# Altium PCB PCB1.PcbDoc
Units mm, origin at the board's own origin, x right, y up, seen from the top; angles counter-clockwise.
Board outline 95 x 94 mm, 2 copper layers (Top Layer, Bottom Layer); 18 components, 17 nets, 75 pads, 0 vias.
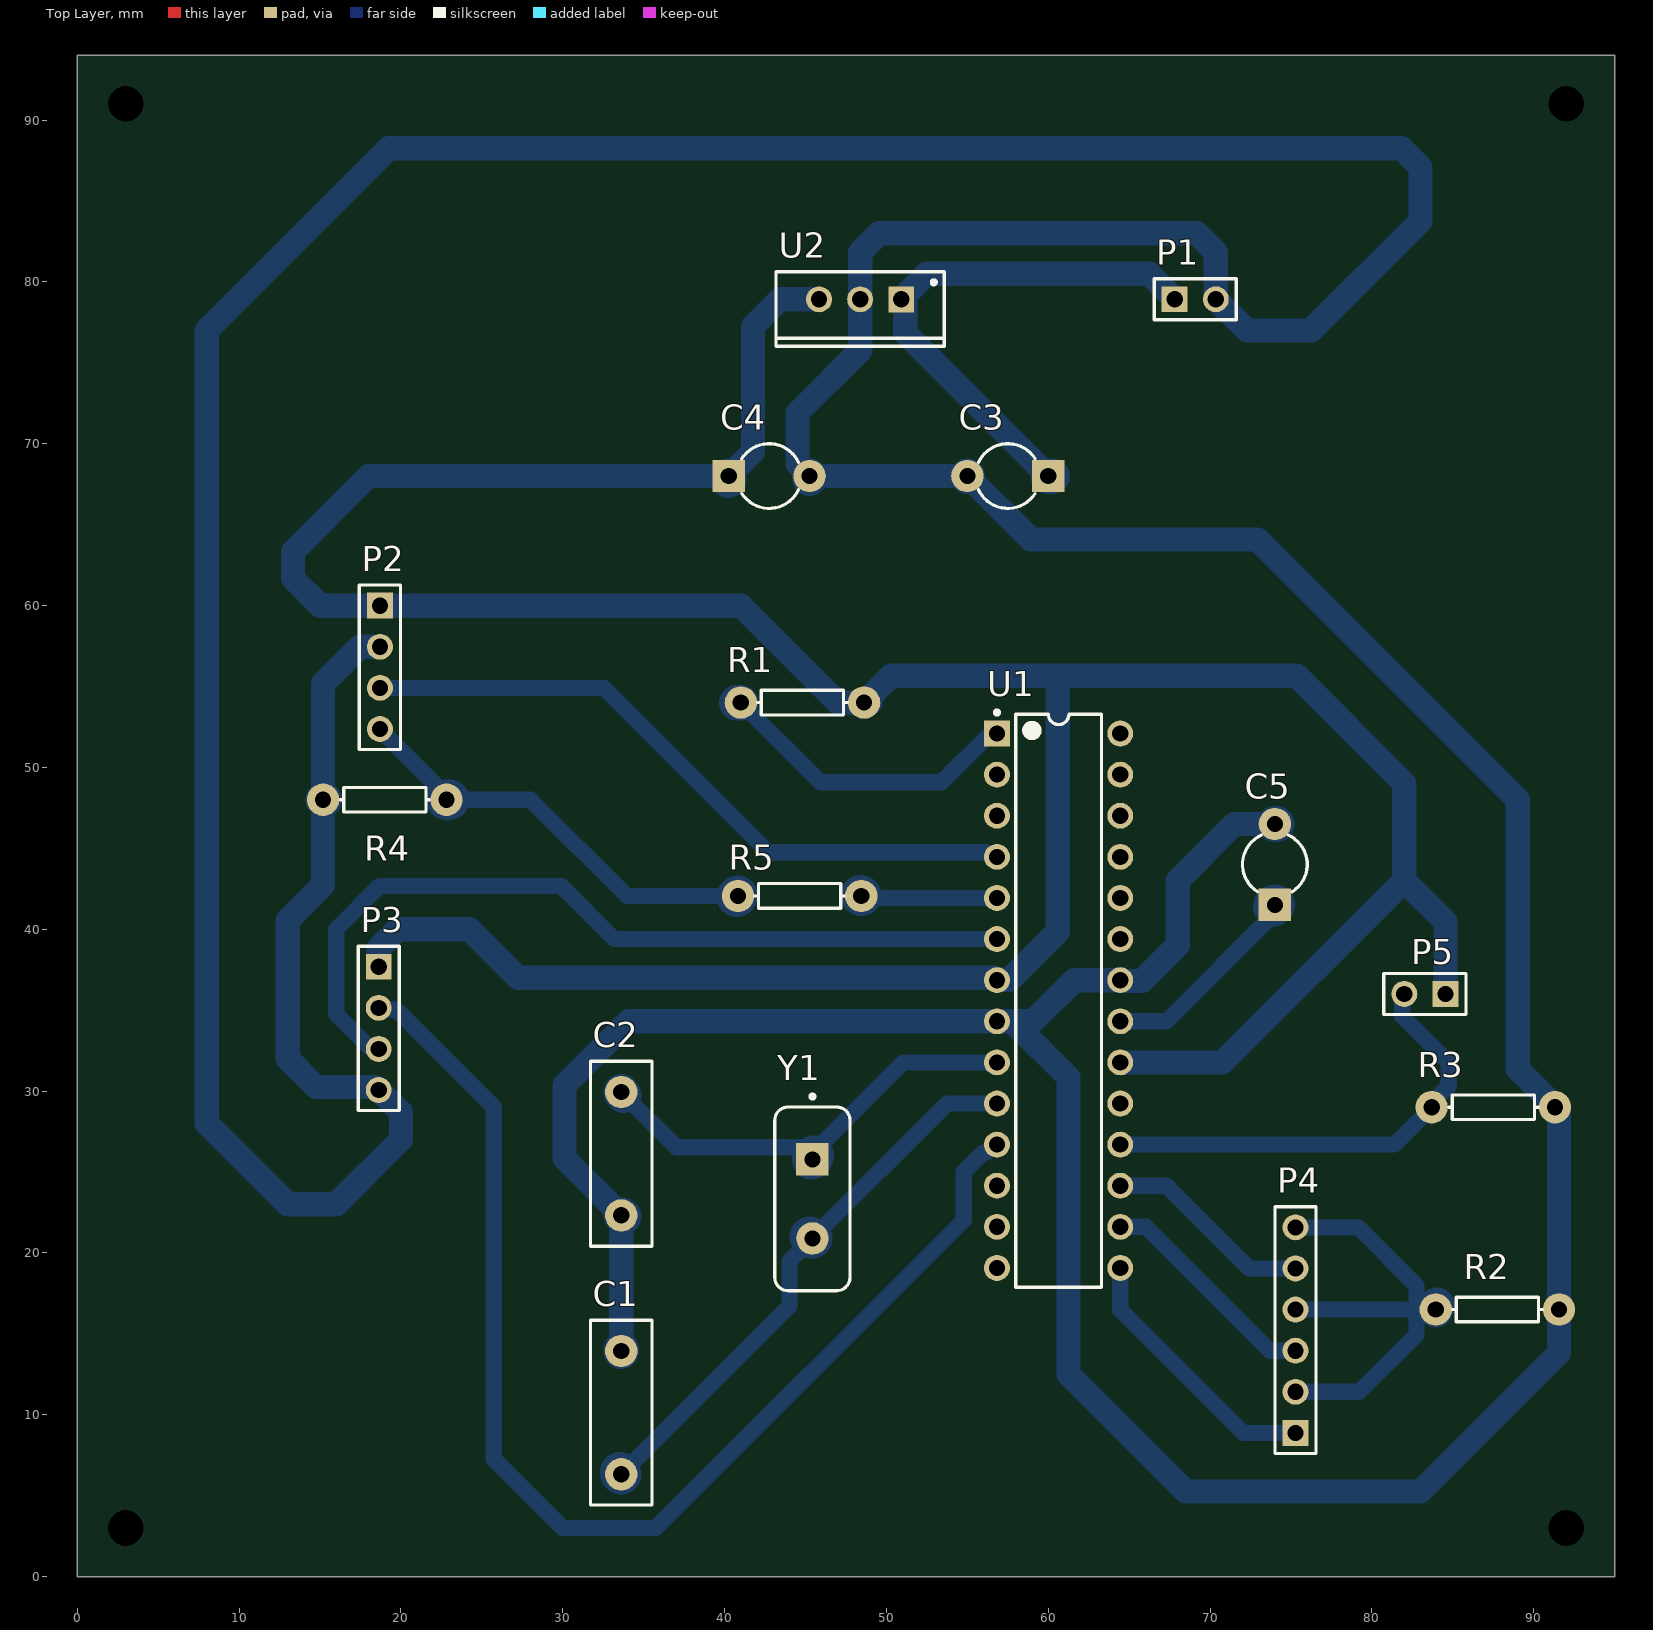
[diagram p0: Top Layer view]
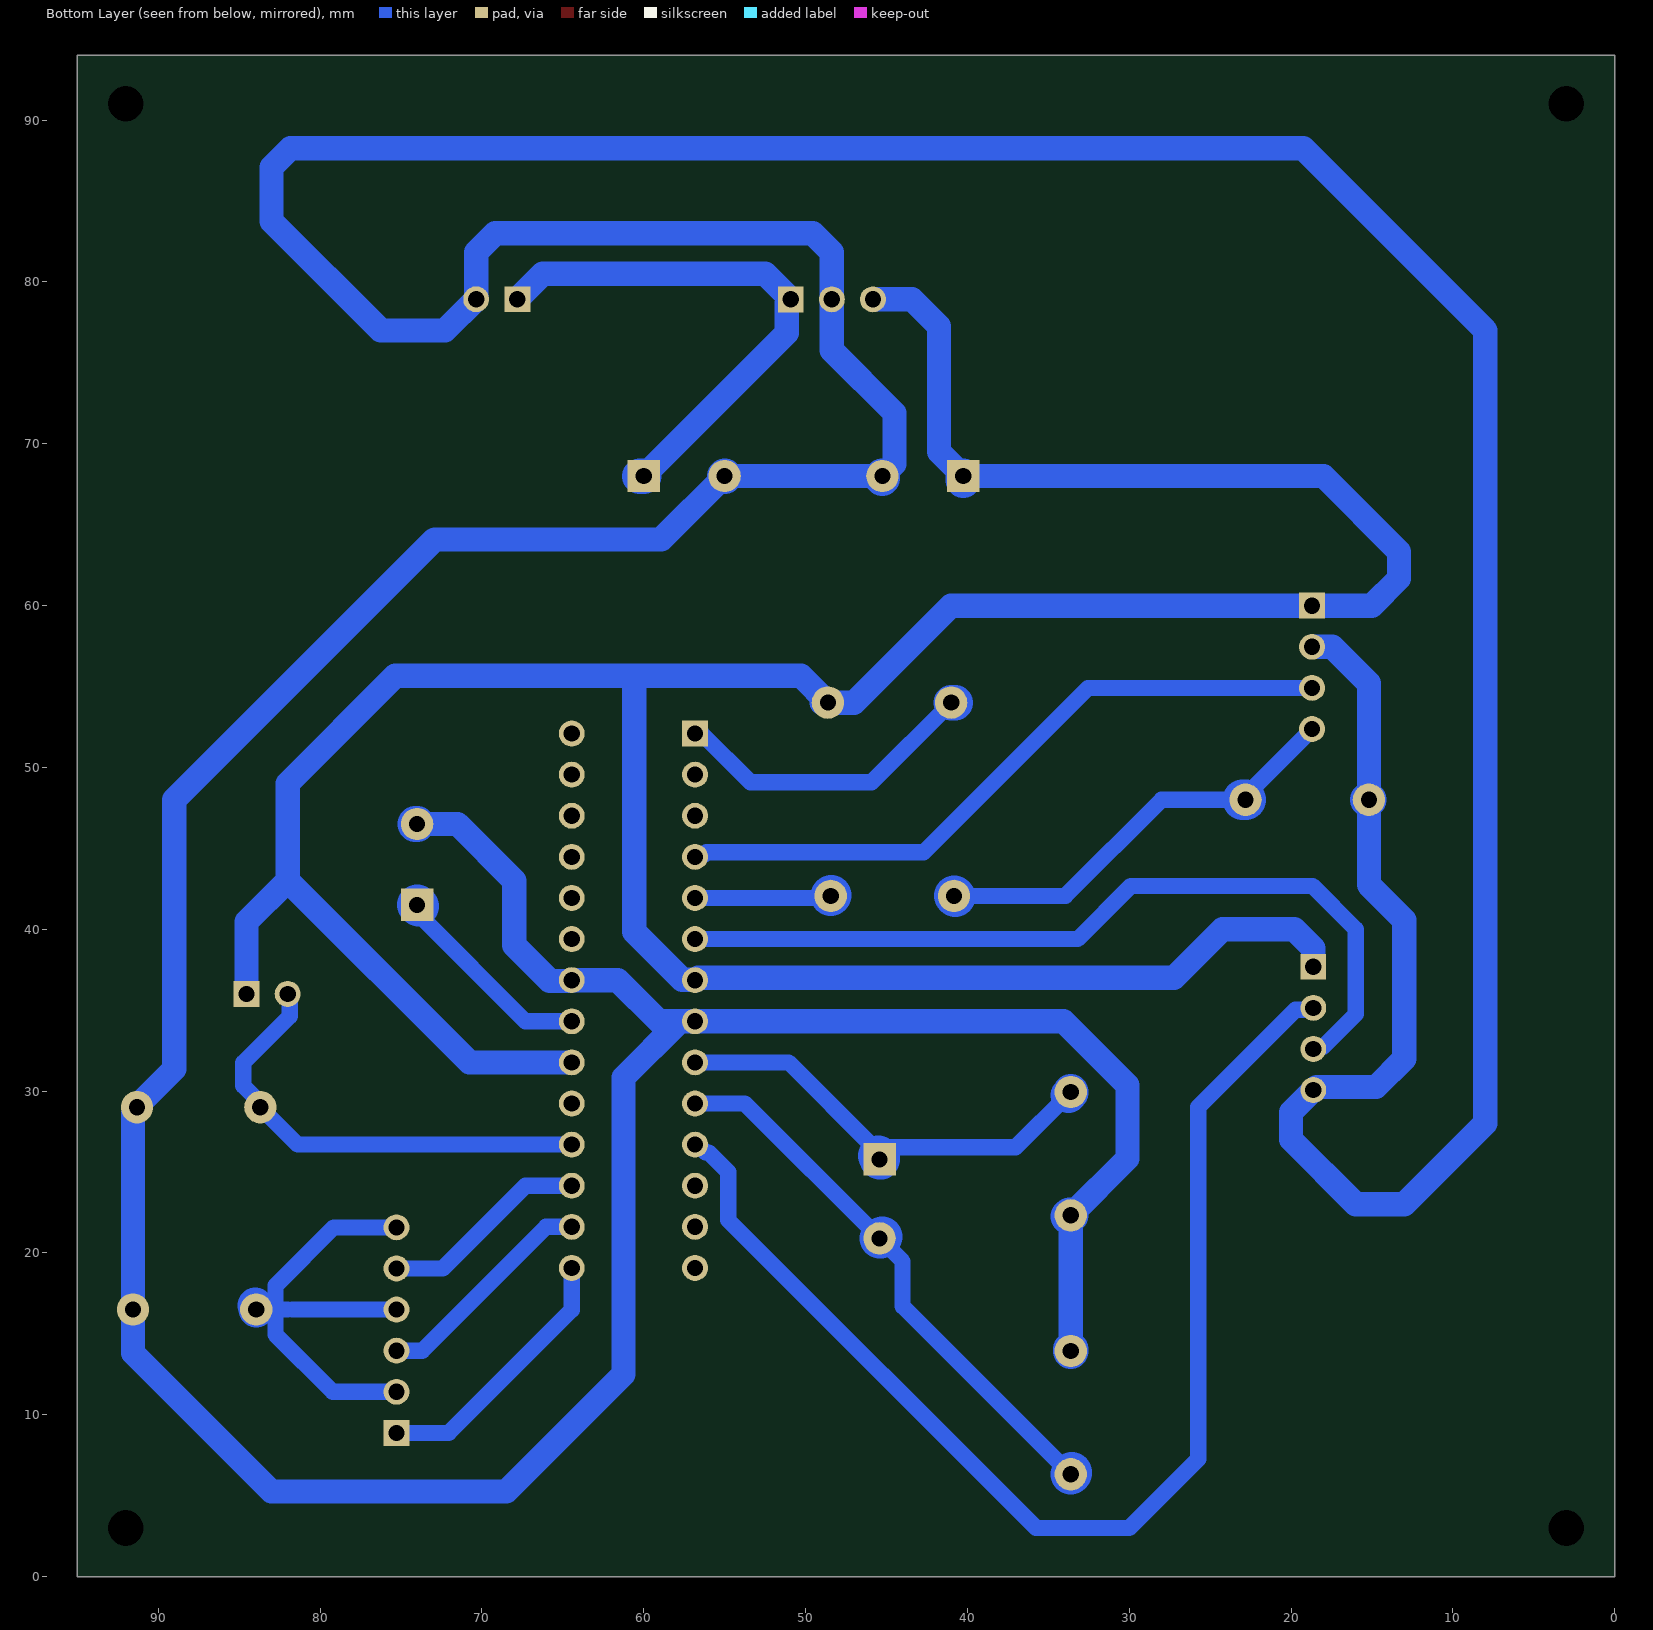
[diagram p1: Bottom Layer view, seen from below]

## Layer stack, top to bottom
Top Solder: solder mask 0.0102, Solder Resist, Dk 3.5
Top Layer: signal copper 0.0356
Dielectric 1: dielectric 0.32, FR-4, Dk 4.8
Bottom Layer: signal copper 0.0356
Bottom Solder: solder mask 0.0102, Solder Resist, Dk 3.5

## Board outline
0,0 95,0 95,94 0,94

## Design rules (kind name [scope] priority, off if disabled: settings)
Clearance [All] p1: gap=0.75 ignorepadtopadclearanceinfootprint=FALSE
HoleSize [All] p1: absolutevalues=TRUE maxlimit=2.54 minlimit=0.8 maxpercent=80.000 minpercent=20.000
PolygonConnect [All] p1: connectstyle=Relief reliefconductorwidth=0.254 reliefentries=4 polygonreliefangle="90 Angle" airgapwidth=0.254
RoutingVias [All] p1: holewidth=0.711 width=1.27 viastyle="Through Hole" minholewidth=0.711 minwidth=1.27 maxholewidth=0.711 maxwidth=1.27
SilkToSolderMaskClearance [IsText] p1: minsilkscreentomaskgap=0.254 clearancetoexposedcopper=TRUE
SolderMaskExpansion [All] p1: expansion=0.102 istentingtop=FALSE
Width Width_1 [InNet('+5V') or InNet('GND')] p1: maxlimit=3 minlimit=1.5 preferedwidth=2.2
Width [All] p2: maxlimit=3 minlimit=1 preferedwidth=1 minimp=50.000000 maximp=50.000000 favimp=50.000000
28 further rules are at their usual default settings.

## Components (designator, comment, footprint, x,y, rotation, side; value= is the part's Value field where it differs from the comment)
C1 "Cap" RAD-0.3 33.613,10.128 r90 top value=22pF
C2 "Cap" RAD-0.3 33.613,26.13 r270 top value=22pF
C3 "Cap2" CAPR5-4X5 57.5,68 r180 top value=0.33uF
C4 "Cap2" CAPR5-4X5 42.75,68 r0 top value=0.1uF
C5 "Cap2" CAPR5-4X5 74,44 r90 top value=0.1uF
P1 "Connector" HDR1X2 67.81,78.925 r0 top
P2 "For Bluetooth" HDR1X4 18.7,59.99 r270 top
P3 "For HX711" HDR1X4 18.625,37.68 r270 top
P4 "For LEDs" HDR1X6 75.275,8.875 r90 top
P5 "Push Button" HDR1X2 84.54,36 r180 top
R1 "Res1" AXIAL-0.3 44.81,54 r180 top value=10kΩ
R2 "Res1" AXIAL-0.3 87.75,16.5 r0 top value=330Ω
R3 "Res1" AXIAL-0.3 87.5,29 r0 top value=10kΩ
R4 "Res1" AXIAL-0.3 19,48 r180 top value=470Ω
R5 "Res1" AXIAL-0.3 44.635,42.056 r180 top value=330Ω
U1 "ATmega328P-PU" 28P3 60.637,35.579 r0 top
U2 "L7805CP" TO220FP 48.375,78.92 r180 top
Y1 "16 MHz" FOX-FOXSLF160-20 45.424,23.336 r270 top

## Footprints (in the part's own frame and the unit in brackets; to place one, negate y for a bottom-side part, rotate by r counter-clockwise, add the part's x,y. Pads: shape width x height; smd on the part's side, far side on the other; paste and mask are expansions set on the pad)
28P3 [mm] "28-Pin Plastic Dual In-Line Package (PDIP)"
  rect 1.6x1.6 hole 1: 1(-3.81,16.51)
  round 1.6 hole 1: 2(-3.81,13.97) 3(-3.81,11.43) 4(-3.81,8.89) 5(-3.81,6.35) 6(-3.81,3.81) 7(-3.81,1.27) 8(-3.81,-1.27) 9(-3.81,-3.81) 10(-3.81,-6.35) 11(-3.81,-8.89) 12(-3.81,-11.43) 13(-3.81,-13.97) 14(-3.81,-16.51) 15(3.81,-16.51) 16(3.81,-13.97) 17(3.81,-11.43) 18(3.81,-8.89) 19(3.81,-6.35) 20(3.81,-3.81) 21(3.81,-1.27) 22(3.81,1.27) 23(3.81,3.81) 24(3.81,6.35) 25(3.81,8.89) 26(3.81,11.43) 27(3.81,13.97) 28(3.81,16.51)
  silkscreen extent -3.93,-17.7 2.65,17.93, body extent -3.6,-17.65 3.6,17.65, height 4.58
AXIAL-0.3 [mm] "Axial Device, Thru-Hole; 2 Leads; 0.3 in Pin Spacing"
  round 2 hole 1: 1(-3.81,0) 2(3.81,0)
  silkscreen extent -2.77,-0.76 2.77,0.76
CAPR5-4X5 [mm] "Capacitor; 2 Leads"
  rect 2x2 hole 1: 1(-2.5,0)
  round 2 hole 1: 2(2.5,0)
  silkscreen extent -1.69,-2 1.82,2
FOX-FOXSLF160-20 [mm] "THD, 2-Leads, Body 11.35x4.65mm"
  rect 2x2 hole 1: 1(-2.44,0)
  round 2 hole 1: 2(2.44,0)
  silkscreen extent -6.45,-2.32 5.68,2.32, body extent -5.67,-2.32 5.68,2.33, height 3.6
HDR1X2 [mm] "Connector; Header; 2 Position"
  rect 1.6x1.6 hole 1: 1(0,0)
  round 1.6 hole 1: 2(2.54,0)
  silkscreen extent -1.27,-1.27 3.81,1.27
HDR1X4 [mm] "Connector; Header; 4 Position"
  rect 1.6x1.6 hole 1: 1(0,0)
  round 1.6 hole 1: 2(2.54,0) 3(5.08,0) 4(7.62,0)
  silkscreen extent -1.27,-1.27 8.89,1.27
HDR1X6 [mm] "Connector; Header; 6 Position"
  rect 1.6x1.6 hole 1: 1(0,0)
  round 1.6 hole 1: 2(2.54,0) 3(5.08,0) 4(7.62,0) 5(10.16,0) 6(12.7,0)
  silkscreen extent -1.27,-1.27 13.97,1.27
RAD-0.3 [mm] "Radial Cap, Thru-Hole; 2 Leads; 0.3 in Pin Spacing"
  round 2 hole 1: 1(-3.81,0) 2(3.81,0)
  silkscreen extent -5.71,-1.91 5.71,1.91
TO220FP [mm] "TO, Thru-Hole, Vertical, Heatsink Mounted; 3 In-Line Leads; Pitch 2.54 mm"
  rect 1.6x1.6 hole 1: 1(-2.54,0)
  round 1.6 hole 1: 2(0,0) 3(2.54,0)
  silkscreen extent -5.2,-1.7 5.2,2.9, body extent -5.25,-1.75 5.25,2.95, height 20

## Part data
C1 C2 C3 C4 C5: "Capacitor", Publisher="Altium Limited"
  C1 C2: LatestRevisionDate=17-Jul-2002, LatestRevisionNote="Re-released for DXP Platform.", PackageDescription="Radial Cap, Thru-Hole; 2 Leads; 0.3 in Pin Spacing", PackageReference=RAD-0.3, Published=8-Jun-2000
  C3 C4 C5: PackageDescription="Capacitor; 2 Leads", PackageReference=CAPR5-4X5, Published=23-Sep-2002
P1 P5: library part "Header 2", "Header, 2-Pin", LatestRevisionDate=17-Jul-2002, LatestRevisionNote="Re-released for DXP Platform.", Publisher="Altium Limited"
P2 P3: library part "Header 4", "Header, 4-Pin", LatestRevisionDate=17-Jul-2002, LatestRevisionNote="Re-released for DXP Platform.", Publisher="Altium Limited"
P4: library part "Header 6", "Header, 6-Pin", LatestRevisionDate=17-Jul-2002, LatestRevisionNote="Re-released for DXP Platform.", Publisher="Altium Limited"
R1 R2 R3 R4 R5: "Resistor", LatestRevisionDate=17-Jul-2002, LatestRevisionNote="Re-released for DXP Platform.", PackageDescription="Axial Device, Thru-Hole; 2 Leads; 0.3 in Pin Spacing", PackageReference=AXIAL-0.3, Published=8-Jun-2000, Publisher="Altium Limited"
U1: library part CMP-0095-00013-2, "8-bit AVR Microcontroller, 32KB Flash, 1KB EEPROM, 2KB SRAM, 28-pin PDIP, Industrial Grade (-40°C to 85°C)", ComponentLink1Description="Manufacturer URL", ComponentLink1URL=http://www.atmel.com/, ComponentLink2Description="ATmega48A/48PA/88A/88PA/168A/168PA/328/328P Datasheet", ComponentLink2URL=http://www.atmel.com/dyn/resources/prod_documents/8271.pdf, ComponentLink3Description="ATmega48A/48PA/88A/88PA/168A/168PA/328/328P Summary", ComponentLink3URL=http://www.atmel.com/dyn/resources/prod_documents/8271S.pdf, DatasheetVersion="revD, May-2011", PackageDescription="28-lead (0.300\"/7.62mm Wide) Plastic Dual Inline Package (PDIP)", PackageReference=28P3, PackageVersion="revB, Sep-2001", RevisionNote="DatasheetVersion updated. URLs added."
U2: library part CMP-0244-00474-1, "Positive Voltage Regulator, 5V, 3-Pin TO-220FP", ComponentLink1Description="Manufacturer URL", ComponentLink1URL=http://www.st.com, ComponentLink2Description=Datasheet, ComponentLink2URL=http://www.st.com/internet/com/TECHNICAL_RESOURCES/TECHNICAL_LITERATURE/DATASHEET/CD00000444.pdf, DatasheetVersion=16/11/2011, PackageDescription="TO, Thru-Hole, Vertical, Heatsink Mounted; 3 In-Line Leads; Pitch 2.54 mm", PackageReference=TO220FP, PackageVersion=2011
Y1: library part CMP-1749-00003-1, "Resistance Weld Thru-Hole Crystal, 16 MHz, -20 to 70 degC, 2-Pin THD, RoHS, Bulk", Case\Package=Axial, Max Operating Temperature="155 degC", Min Operating Temperature="-55 degC", Package Quantity=200, Power Rating="250 mW", Resistance="221 kohm", Tolerance=1%, Voltage Rating="250 V", ComponentLink1Description="Manufacturer URL", ComponentLink1URL=http://www.foxonline.com/, ComponentLink2Description=Datasheet, ComponentLink2URL=http://www.foxonline.com/pdfs/hc49slf.pdf, DatasheetVersion=Mar-15, Length="0.248 inch", Mount="Through Hole", PackageDescription="2-Pin Through Hole Device, Body 11.35 x 4.65 mm", PackageReference=FOXSLF160-20, Packaging=Bulk, RoHSCompliant=true

## Free pads (board coordinates)
  round 1 hole 2.2 unplated: 14(92,3) 15(3,3) 17(3,91) 18(92,91)

## Nets (pads, with @x,y where several pads share a name; then routed paths per layer and width w, separated by ;. In a path a pad name is that pad's centre, name@x,y a point inside that pad or via, vN(x,y) a via of type N, cw(c..) or ccw(c..) an arc to the next point about the centre after c; other vN are vias at no path point)
+5V: C4.1 P2.1 P3.1 P5.1 R1.1 U1.7 U1.20 U2.3 | length 218.8
  Bottom Layer w1.5: P3.1 18.625,38.828 19.797,40 24.236,40 27.236,37 56.649,37 56.8,36.849 56.819,36.868 57.618,36.868 60.587,39.837 60.587,55.175 ; U2.3 43.42,78.92 41.75,77.25 41.75,69.5 C4.1 40,68 18,68 13.328,63.328 13.328,61.672 15.01,59.99 P2.1 41.01,59.99 47,54 R1.1 ; R1.1@49,54 R1.1 ; U1.20 70.769,31.769 82,43 ; P5.1 84.54,40.46 82,43 ; R1.1 50.275,55.655 75.345,55.655 82,49 82,43
  Bottom Layer w2.2: C4.1@40.25,67.75 C4.1
GND: C1.2 C2.2 C3.2 C4.2 C5.2 P1.2 P2.2 P3.4 R2.2 R3.2 R4.2 U1.8 U1.22 U2.2 | length 463.8
  Bottom Layer w1.5: P2.2 17.45,57.45 15.19,55.19 R4.2 15.19,42.751 13,40.561 13,32 14.75,30.25 18.408,30.25 18.598,30.06 P3.4 20,28.685 20,27 16,23 13,23 8,28 8,77 19.25,88.25 81.828,88.25 83,87.078 83,83.75 76.25,77 72.275,77 P1.2 70.35,81.828 69.178,83 49.547,83 48.375,81.828 U2.2 ; C1.2@33.5,13.75 33.613,13.863 C1.2 ; C1.2@33.5,14.25 C1.2@33.613,14.137 ; C1.2@33.613,14.038 C1.2@33.613,14.137 ; U2.2@48.375,78.893 48.375,75.772 44.5,71.897 44.5,68.75 C4.2 C3.2 58.914,64.086 72.914,64.086 89,48 89,31.364 91.31,29.054 91.31,28.865 91.56,28.615 91.56,13.81 83,5.25 68.5,5.25 61.25,12.5 61.25,30.839 57.78,34.309 ; U1.22@64.42,36.849 61.599,36.849 59.059,34.309 57.78,34.309 ; U1.22 64.466,36.83 64.537,36.83 64.562,36.805 65.805,36.805 68,39 68,43 71.5,46.5 C5.2 ; C5.2@74.125,46.5 C5.2@74.25,46.5 ; C1.2@33.613,14.137 C2.2 30.1,25.833 30.1,30.35 34.059,34.309 57.78,34.309
  Bottom Layer w2.2: R4.2 R4.2@15.25,48 ; C1.2 C1.2@33.613,14.038 ; C2.2 33.68,22.32 C2.2@33.75,22.25 ; C4.2@45.25,67.875 C4.2 ; C5.2 C5.2@74.125,46.5
NetC1_1: C1.1 U1.10 Y1.2 | length 34.8
  Bottom Layer w1: C1.1 44,16.705 44,19.472 Y1.2 53.757,29.229 U1.10
  Bottom Layer w2: C1.1@33.5,6.5 C1.1@33.556,6.443
  Bottom Layer w2.5: C1.1@33.556,6.443 33.556,6.374 C1.1 ; Y1.2@45.25,21 45.354,20.896 Y1.2
NetC2_1: C2.1 U1.9 Y1.1 | length 26.9
  Bottom Layer w1: C2.1@33.776,29.776 37.028,26.525 Y1.1@45.3,26.525 ; Y1.1@45.8,26.525 51.044,31.769 U1.9 U1.9@56.846,31.75
  Bottom Layer w2: Y1.1@45.3,25.525 45.424,25.649 Y1.1
  Bottom Layer w2.2: C2.1 33.613,29.887 C2.1@33.75,29.75
  Bottom Layer w2.5: Y1.1 45.424,25.924 Y1.1@45.5,26
NetC3_1: C3.1 P1.1 U2.1 | length 33.1
  Bottom Layer w1.5: C3.1 51.165,76.835 51.165,78.67 U2.1 52.495,80.5 66.235,80.5 P1.1
  Bottom Layer w2.2: C3.1 C3.1@60.25,68
NetC5_1: C5.1 U1.21 | length 12.8
  Bottom Layer w1: U1.21 67.309,34.309 73.825,40.825 73.825,41.325 C5.1@73.912,41.413
  Bottom Layer w2.5: C5.1@73.912,41.413 C5.1
NetP2_3: P2.3 U1.4 | length 42.5
  Bottom Layer w1: P2.3 32.543,54.91 42.703,44.75 56.122,44.75 56.288,44.584 56.712,44.584 U1.4
NetP2_4: P2.4 R4.1 R5.2 | length 26.6
  Bottom Layer w1: P2.4 22.81,48.26 R4.1 ; R4.1@23,48 28,48 33.944,42.056 R5.2@40.806,42.056
  Bottom Layer w2.5: R4.1 R4.1@23,48 ; R5.2@40.75,42 40.806,42.056 R5.2
NetP3_2: P3.2 U1.11 | length 75.8
  Bottom Layer w1: P3.2 18.74,35.025 19.725,35.025 25.735,29.015 25.735,7.265 30,3 35.75,3 54.777,22.027 54.777,23.3 54.777,24.998 55.978,26.199 56.175,26.199 56.665,26.689 U1.11
NetP3_3: P3.3 U1.6 | length 52.1
  Bottom Layer w1: P3.3 18.51,32.715 18.035,32.715 16,34.75 16,40 18.671,42.671 29.909,42.671 33.191,39.389 U1.6
NetP4_1: P4.1 U1.15 | length 16.6
  Bottom Layer w1: U1.15 64.447,16.478 72.05,8.875 P4.1
NetP4_2: P4.2 P4.4 P4.6 R2.1 | length 29.3
  Bottom Layer w1: P4.2 79.215,11.415 82.75,14.95 82.75,16.5 ; P4.6 79.15,21.575 82.75,17.975 82.75,16.75 ; P4.4@75.28,16.5 81.715,16.5 ; 82,16.5 82.75,16.5 ; R2.1 82.75,16.5
  Bottom Layer w2.2: R2.1 83.94,16.69 R2.1@84,16.75
NetP4_3: P4.3 U1.16 | length 13.7
  Bottom Layer w1: U1.16 66.034,21.609 73.688,13.955 P4.3@74.95,13.955 ; P4.3@75.255,13.975 P4.3
NetP4_5: P4.5 U1.17 | length 12.9
  Bottom Layer w1: U1.17 67.304,24.149 72.418,19.035 P4.5
NetP5_2: P5.2 R3.1 U1.18 | length 28.9
  Bottom Layer w1: U1.18 81.379,26.689 R3.1 83.69,29.271 84.75,30.331 84.75,31.75 81.876,34.624 81.876,35.714 82,35.838 P5.2
NetR1_2: R1.2 U1.1 | length 19.4
  Bottom Layer w1: R1.2 45.925,49.075 53.399,49.075 56.413,52.089 U1.1
  Bottom Layer w2.2: R1.2@40.75,54 R1.2
NetR5_1: R5.1 U1.5 | length 8.8
  Bottom Layer w1: R5.1@48.572,41.929 U1.5 U1.5@56.898,42
  Bottom Layer w1.5: R5.1 R5.1@48.572,41.929
  Bottom Layer w2: R5.1@48.35,42.25 48.35,42.151 R5.1@48.397,42.103
  Bottom Layer w2.5: R5.1@48.397,42.103 R5.1
pads on no net: U1.2 U1.3 U1.12 U1.13 U1.14 U1.19 U1.23 U1.24 U1.25 U1.26 U1.27 U1.28

## Silkscreen, mask and mechanical layers (free items; w line width, h text height)
Outline:
  the board outline again, w1